# EAGLE board Dual VCA large - Panel blank (EAGLE 9.6.2)
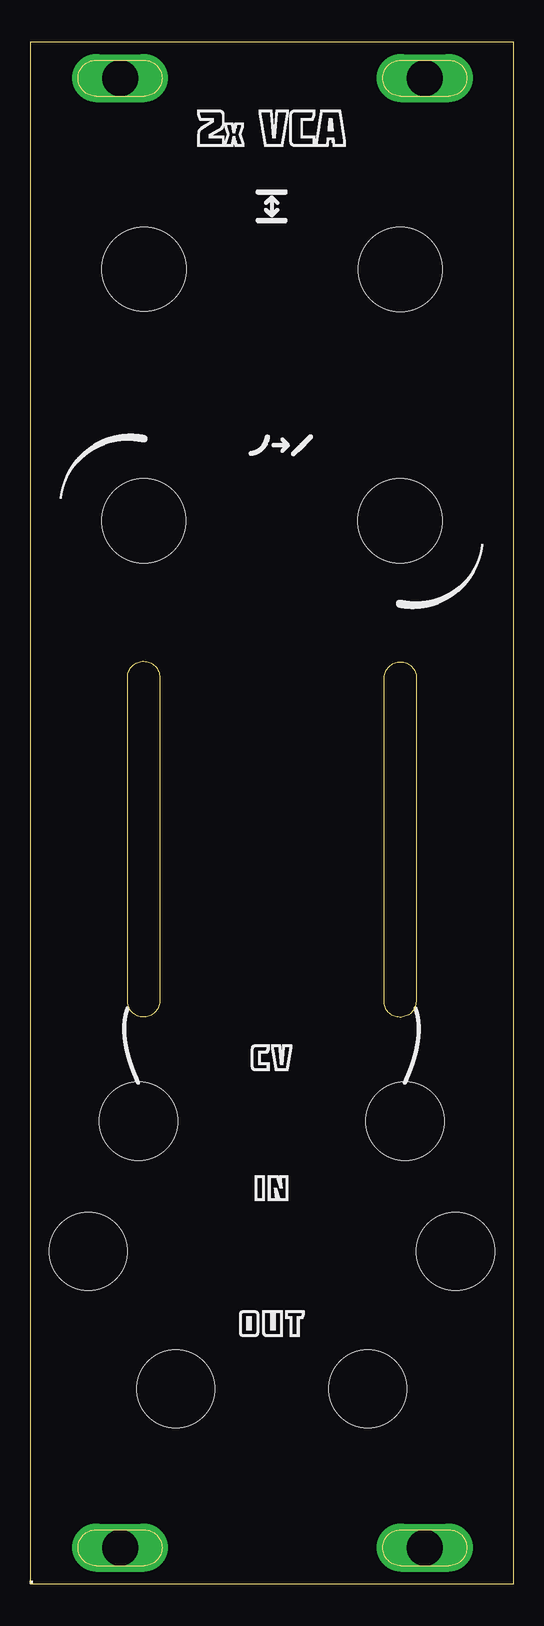
[diagram p0: board, top side]
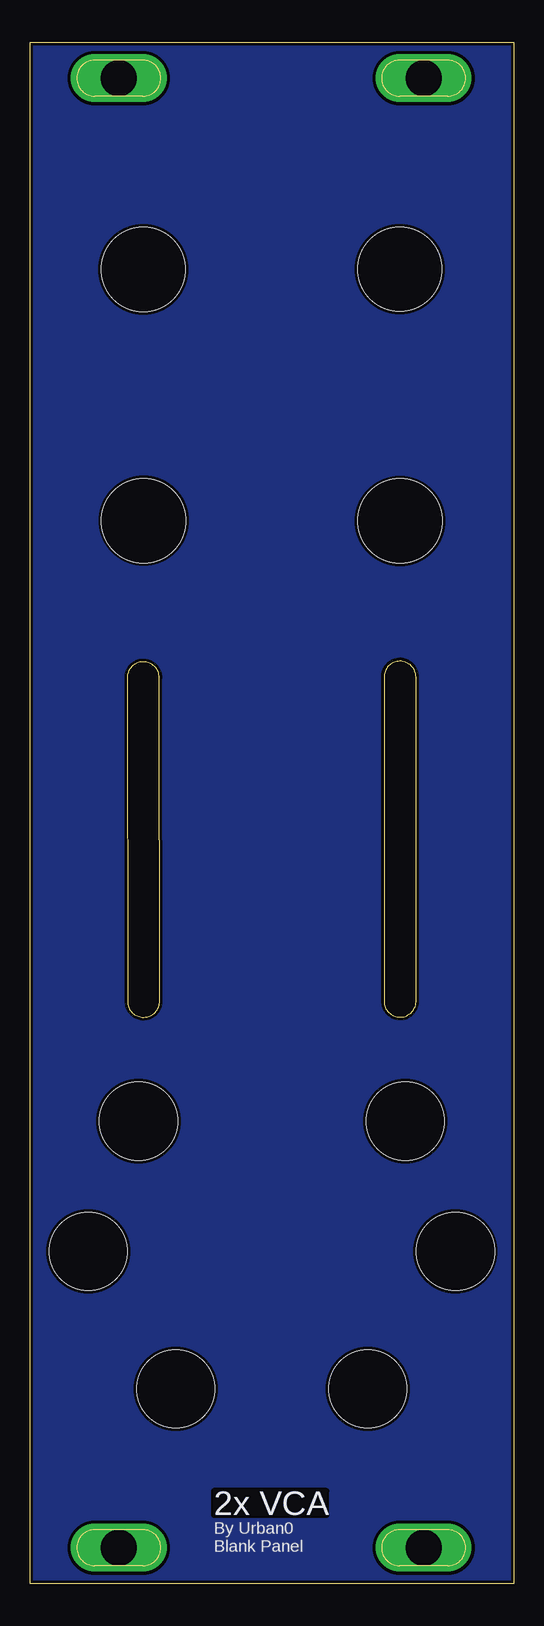
[diagram p1: board, bottom side, seen from below]

Size 40.3 x 128.5 mm. Coordinates in mm from the lower left corner, seen from the top.
Outline: 0,0 40.3,0 40.3,128.5 0,128.5 0,0
Outline: 8.13,48.49 8.13,75.56 arc-176 10.8,75.66 10.8,48.56 arc-177 8.13,48.49
Outline: 29.51,48.47 29.53,75.51 arc-176 32.19,75.61 32.17,48.55 arc-177 29.51,48.47
Copper layers (1*16): Top 0.035mm / dielectric 1.5mm / Bottom 0.035mm
Design rules "default *": minimum track width 6mil, minimum drill 0.35mm, track to track 6mil, track to pad 6mil, pad to pad 6mil, via to via 6mil, smd to smd 6mil, copper to edge 10mil, drill to drill 6mil, minimum pad ring 10mil, minimum via ring 8mil, stop-mask expansion 4mil, vias tented up to drill 0mil, thermal gap 10mil
Holes 6.5 mm at 9.04,38.55 31.26,38.55 4.85,27.71 35.46,27.7 12.15,16.25 28.15,16.25
Holes 7 mm at 9.49,109.57 30.85,109.56 9.47,88.59 30.84,88.61
tRestrict: area 29.5,47.3 to 32.2,76.8; area 8.1,47.3 to 10.8,76.9
bRestrict: area 8.1,47.3 to 10.8,76.9; area 29.5,47.2 to 32.2,76.8

## Footprints (pad centres in the part's own frame; a part is rotated, then mirrored left to right if it is on the bottom)
3MM-MOUNTING = drill 3 long: P$1 0,0

## Placement (x,y rotation side)
H1  3MM-LONG-HOLE  [3MM-MOUNTING]  7.5,3 0 top
H2  3MM-LONG-HOLE  [3MM-MOUNTING]  7.5,125.5 0 top
H3  3MM-LONG-HOLE  [3MM-MOUNTING]  32.9,125.5 0 top
H4  3MM-LONG-HOLE  [3MM-MOUNTING]  32.9,3 0 top

## Library data of the parts
H1-H4 = personal devices

## Tracks (layer width: path | path; a pad name or v marks a point on that pad's centre or on a via)
GND
  pour Bottom (isolate 0.254): -0.08,128.55 -0.08,-0.05 40.45,-0.05 40.45,128.56 -0.09,128.56

## Text on the board
Bottom: 2x VCA
bNames: 2x VCA | By Urban0 / Blank Panel